# Altium PCB PCB2.PcbDoc
Units mm, origin at the board's own origin, x right, y up, seen from the top; angles counter-clockwise.
Board outline 103 x 103 mm, 4 copper layers (Top Layer, Internal Plane 1, Internal Plane 2, Bottom Layer); 6 components, 18 nets, 81 pads, 0 vias.
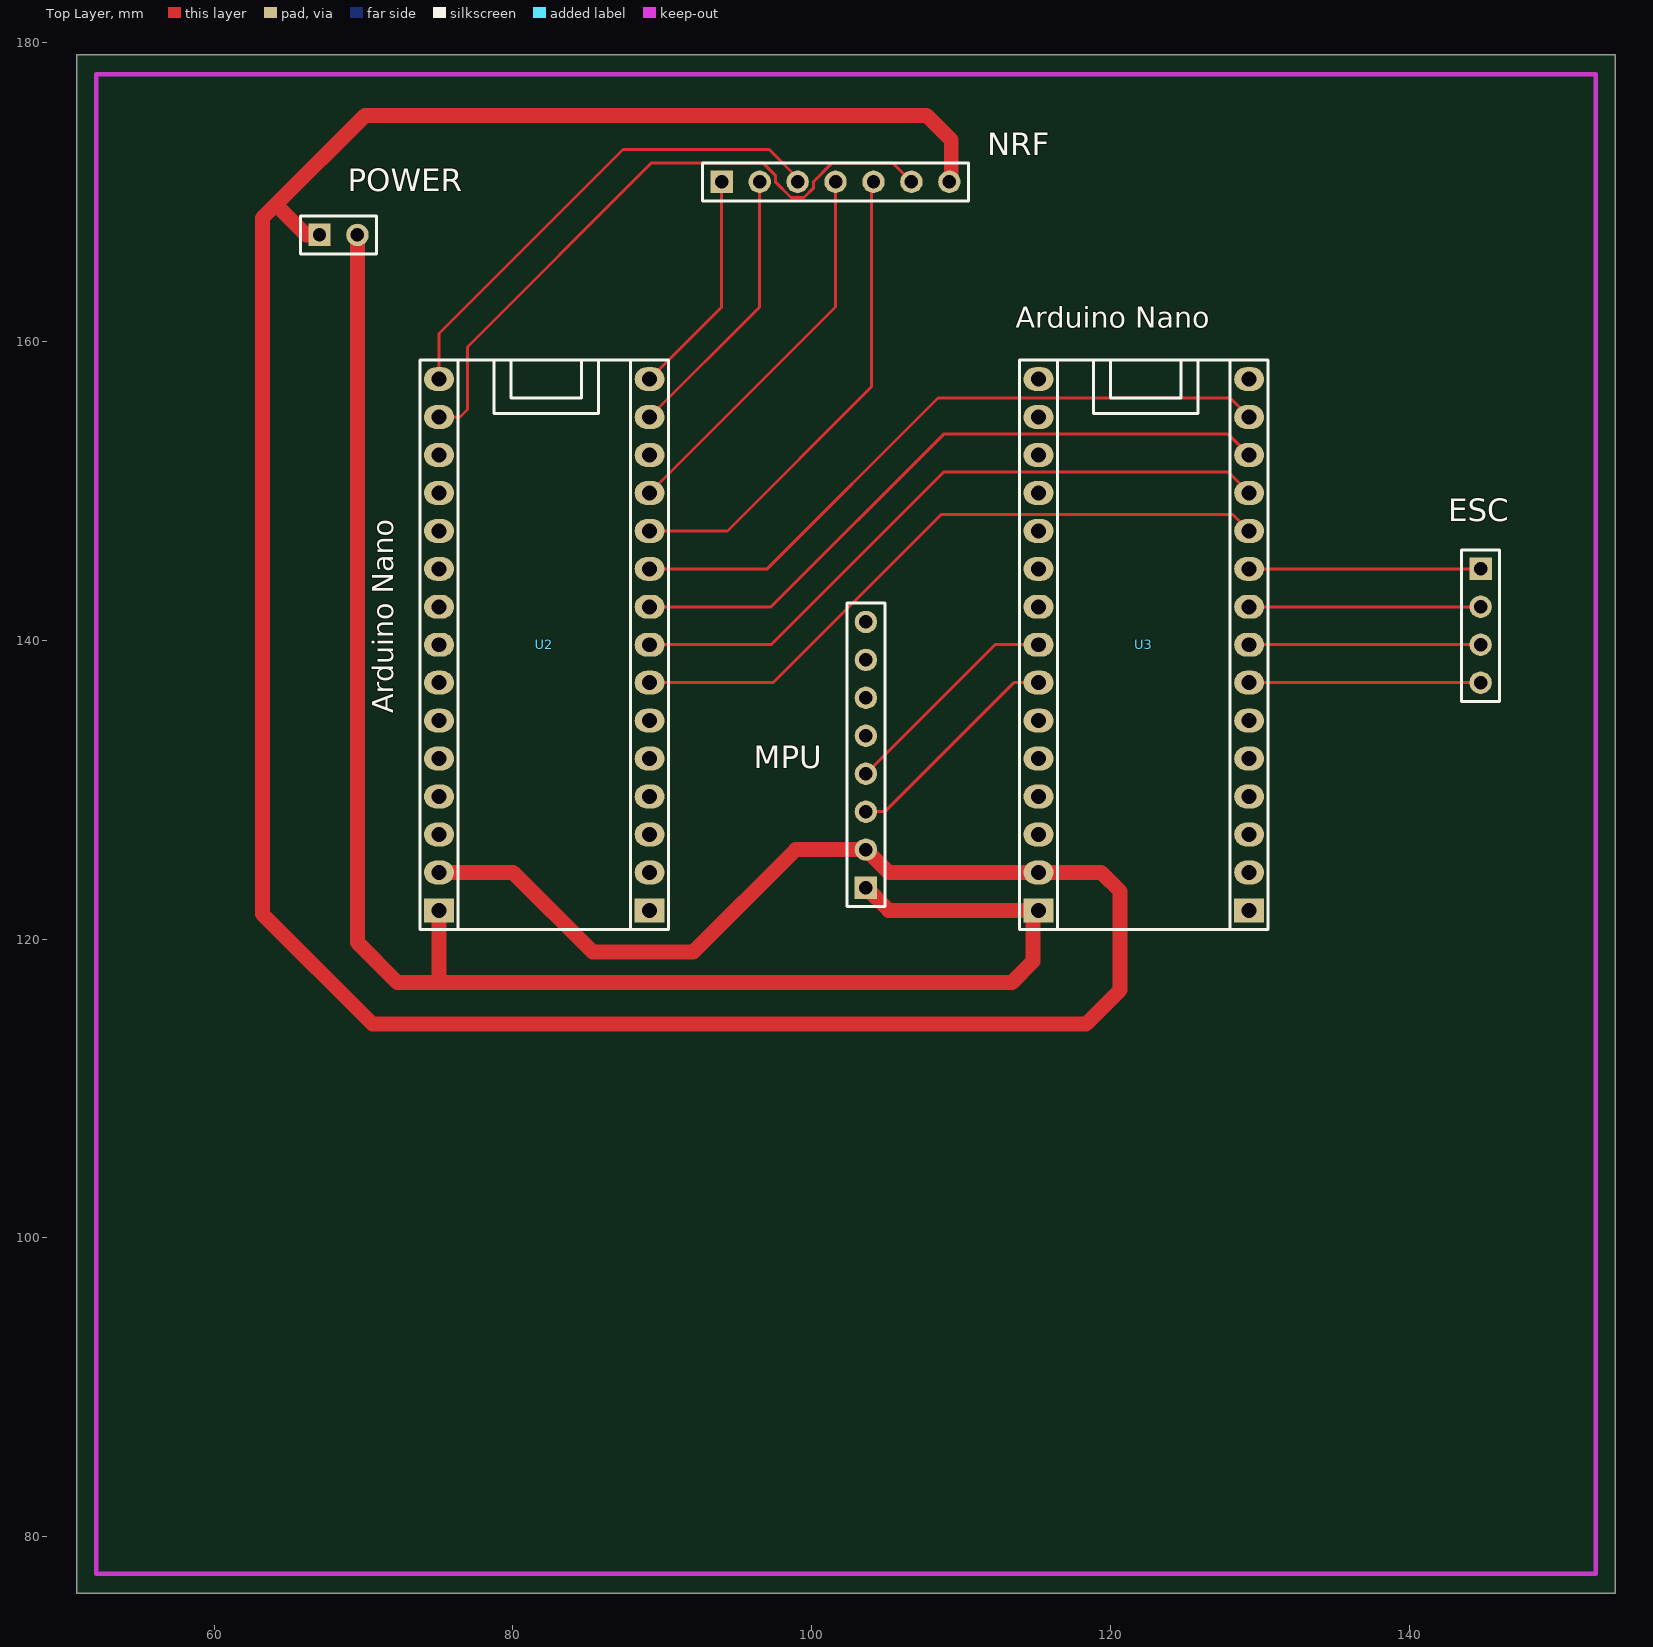
[diagram p0: Top Layer view]
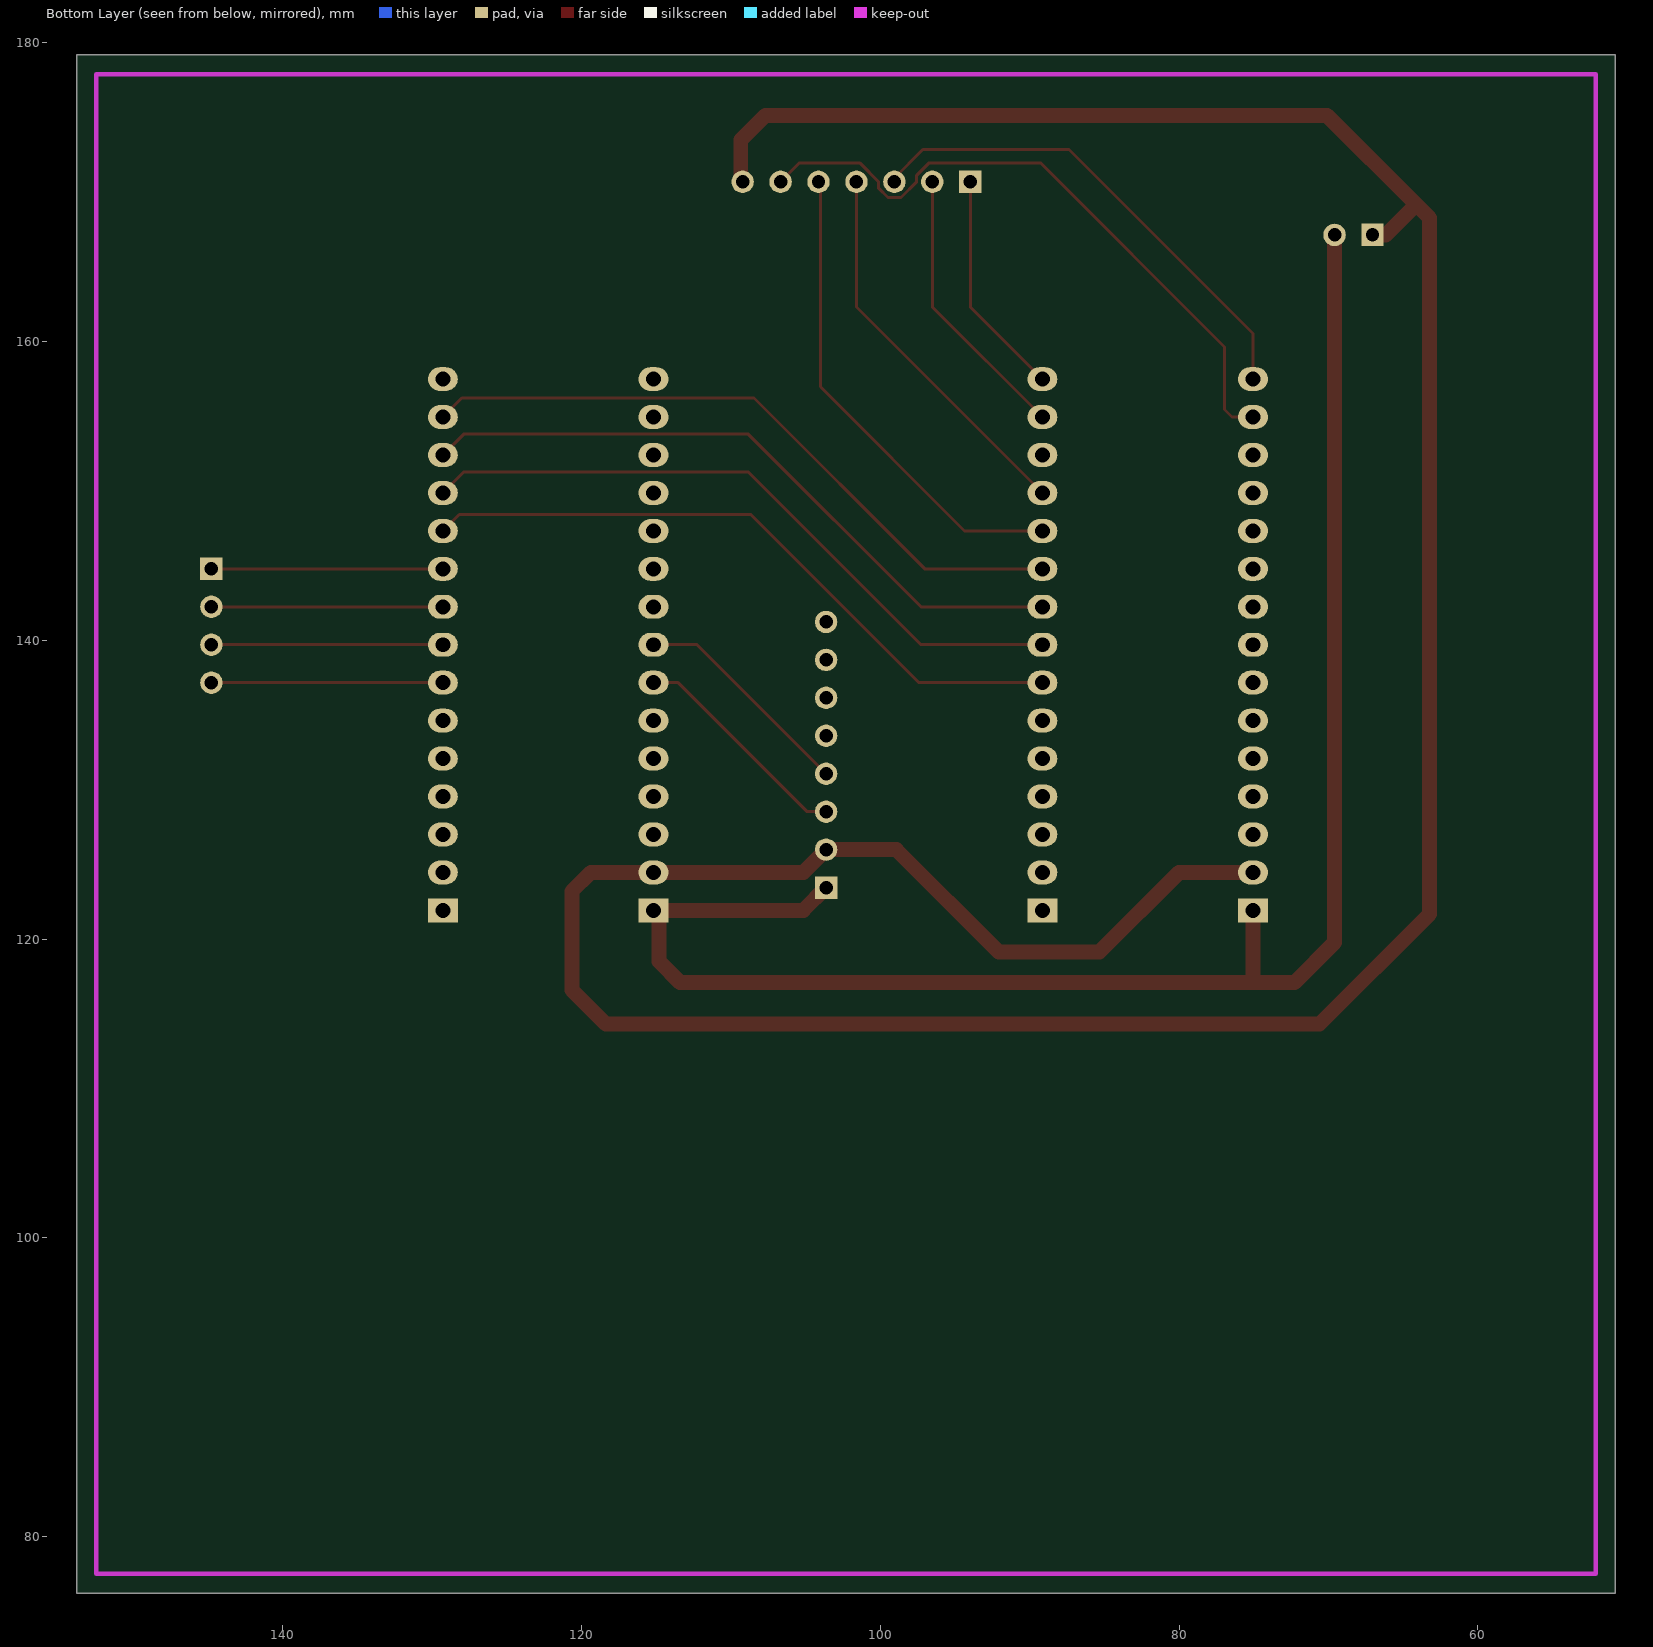
[diagram p1: Bottom Layer view, seen from below]
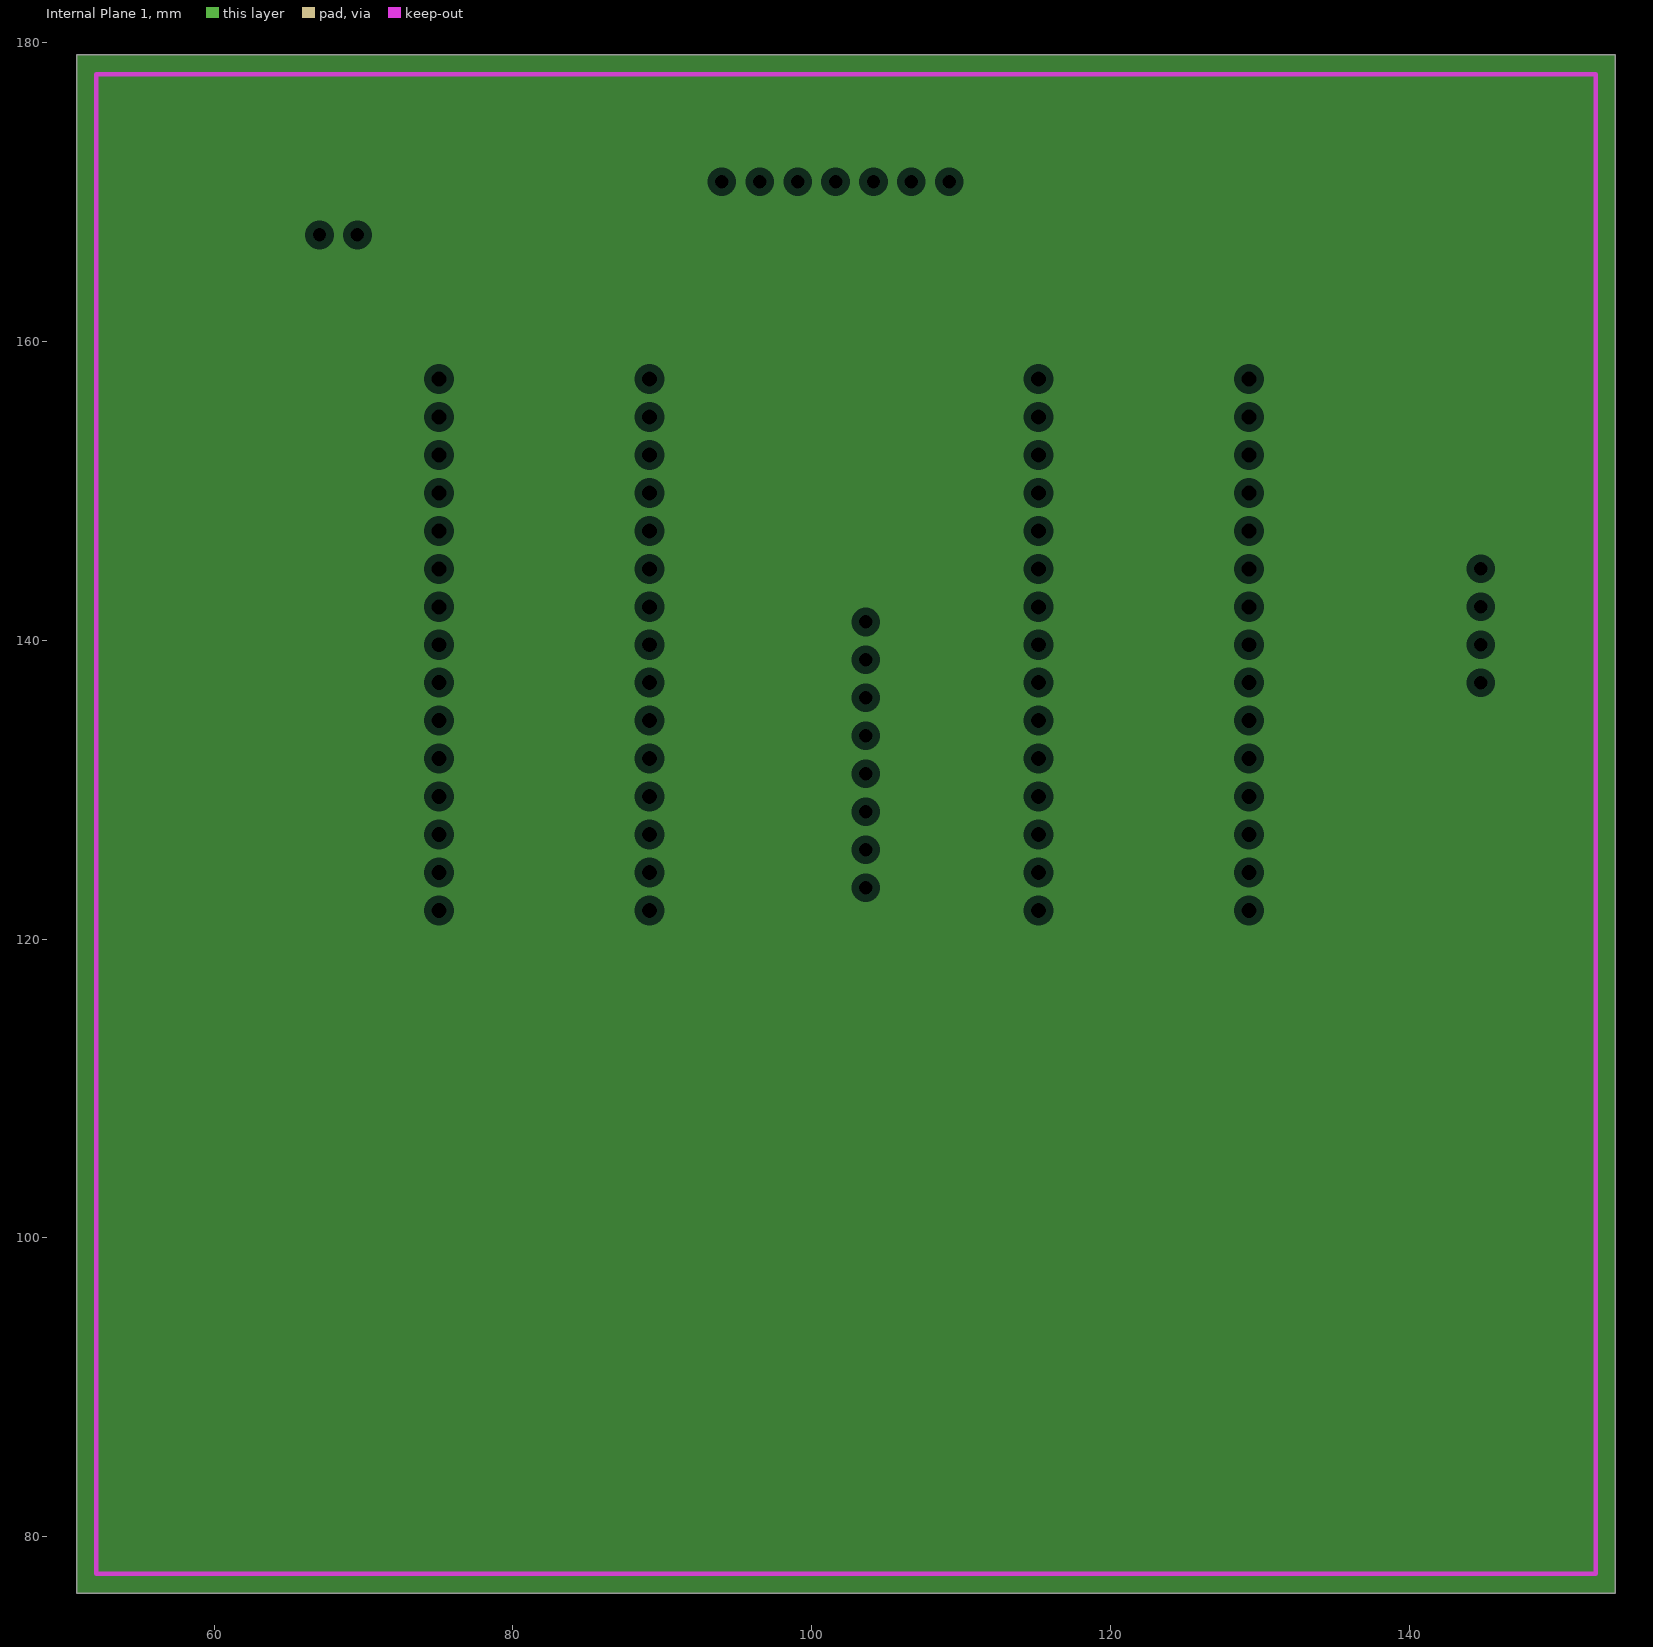
[diagram p2: Internal Plane 1, clearances drawn from the general rule]
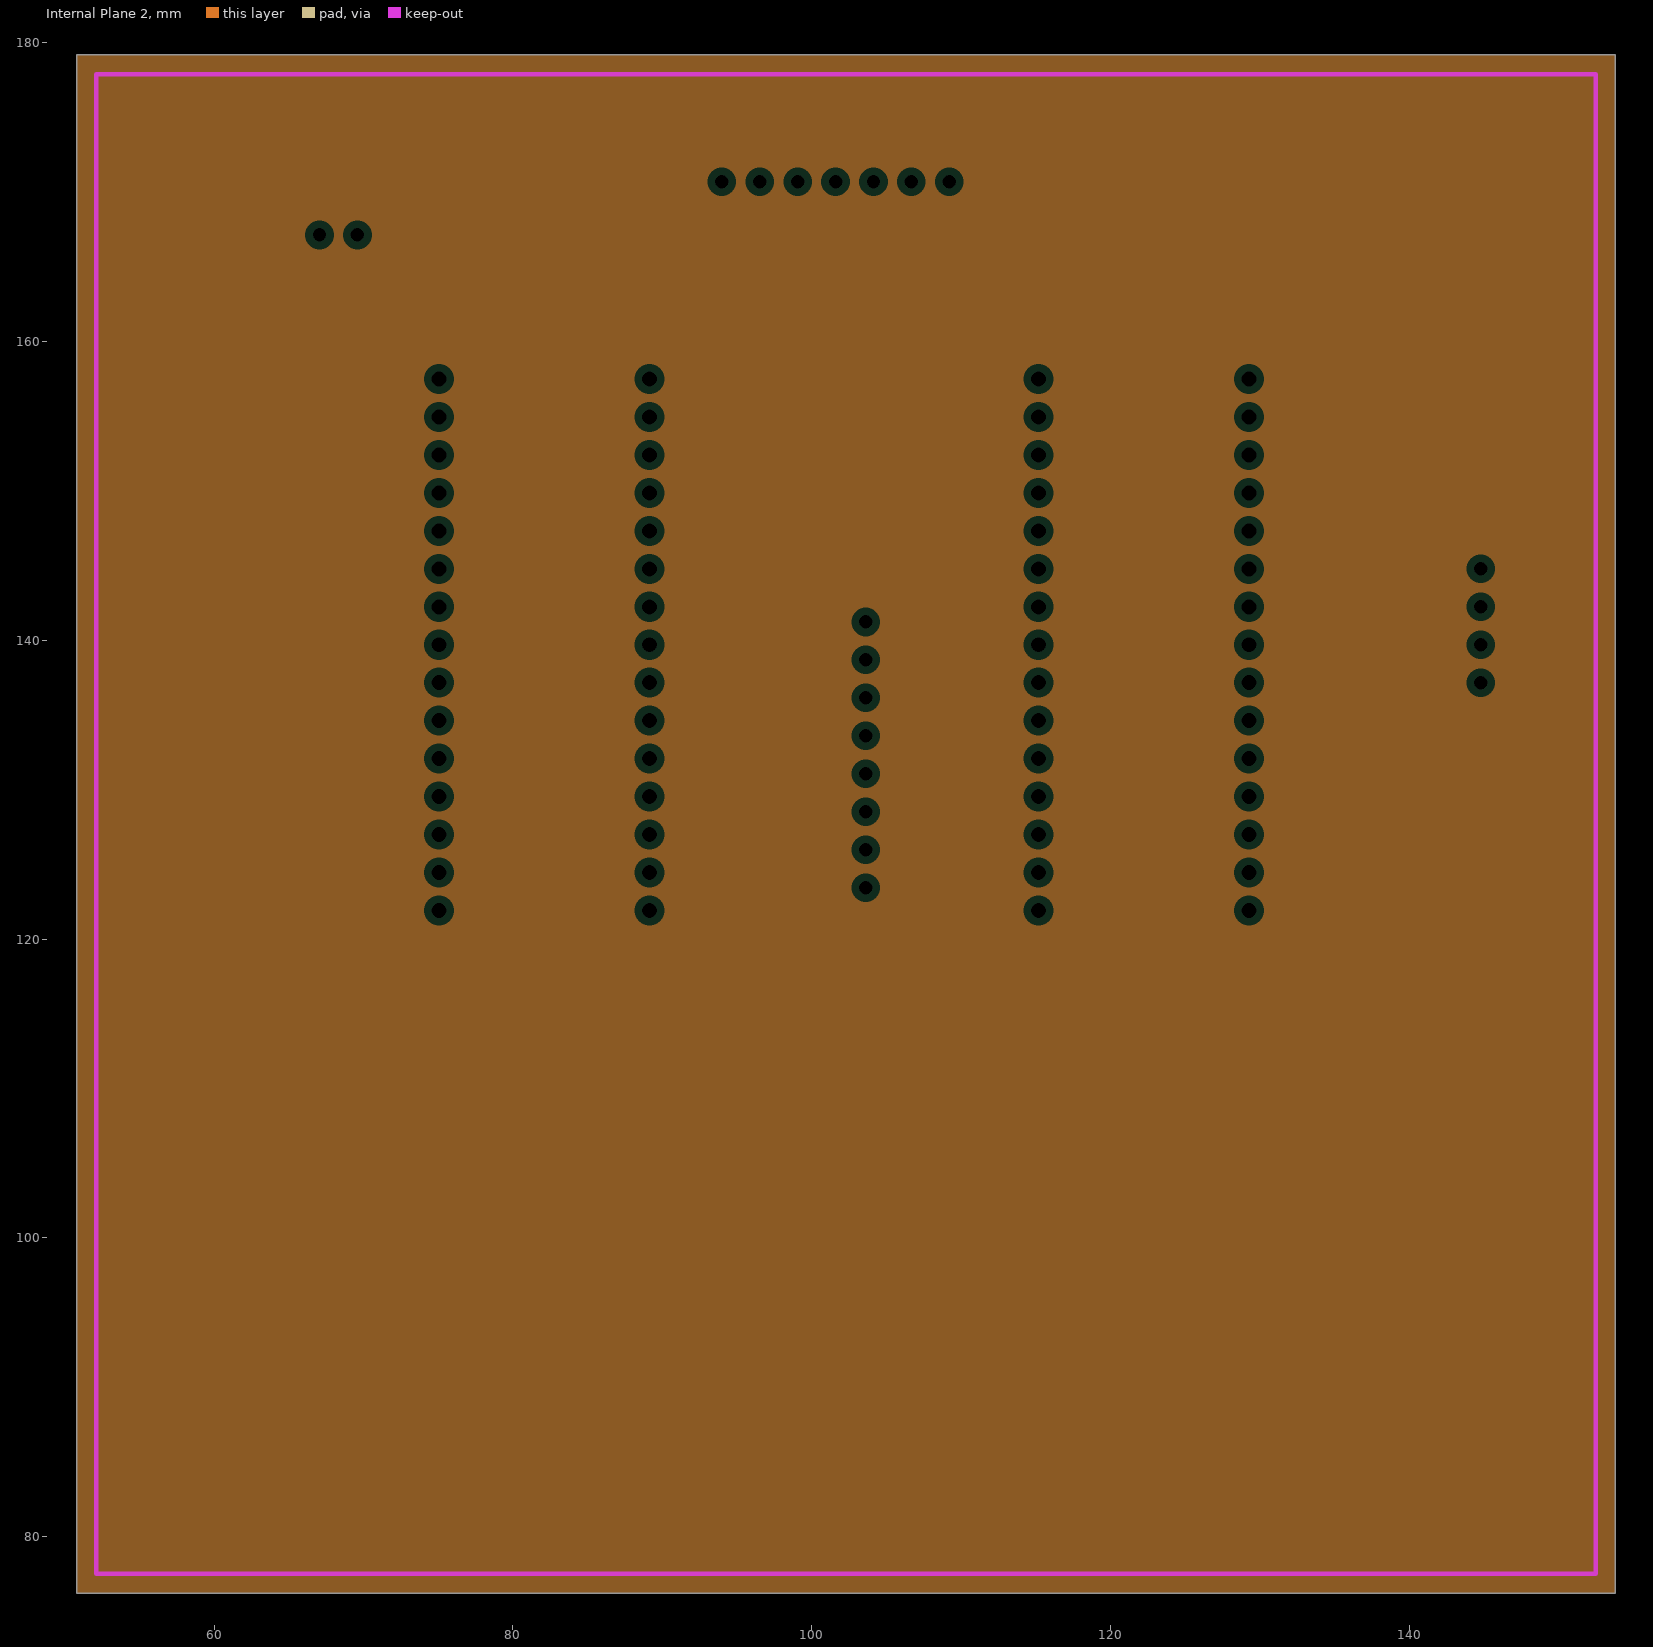
[diagram p3: Internal Plane 2, clearances drawn from the general rule]

## Layer stack, top to bottom
Top Layer: signal copper 0.0356
Dielectric: dielectric 0.32, FR-4, Dk 4.8
Internal Plane 1: plane copper 0.0356
Dielectric: dielectric 0.32, FR-4, Dk 4.8
Internal Plane 2: plane copper 0.0356
Dielectric: dielectric 0.32, FR-4, Dk 4.8
Bottom Layer: signal copper 0.0356

## Board outline
50.8,76.2 153.8,76.2 153.8,179.2 50.8,179.2

## Design rules (kind name [scope] priority, off if disabled: settings)
Clearance [All] p1: gap=0.2
PlaneClearance [All] p1: clearance=0.508
PlaneConnect [All] p1: planeconnectstyle=Relief reliefexpansion=0.508 reliefentries=4 reliefconductorwidth=0.254 reliefairgap=0.254
PolygonConnect [All] p1: connectstyle=Relief reliefconductorwidth=0.254 reliefentries=4 polygonreliefangle="90 Angle"
RoomDefinition Sheet2 [InComponentClass('Sheet2')] p1: confinementstyle=ConfineIn formatcopy=TRUE lockcomponents=FALSE outline 154.94,117.094 207.645,117.094 207.645,160.274 154.94,160.274
RoutingVias [All] p1: holewidth=0.6 width=1 viastyle="Through Hole" minholewidth=0.711 minwidth=1.27 maxholewidth=0.711 maxwidth=1.27
SilkscreenOverComponentPads [All] p1: minsilkscreentomaskgap=0.254
SolderMaskExpansion [All] p1: expansion=0.102
Width GND [InNet('GND')] p1: maxlimit=1 minlimit=1 preferedwidth=1
Width VCC [InNet('+5')] p2: maxlimit=1 minlimit=1 preferedwidth=1
Width [All] p3: maxlimit=0.2 minlimit=0.2 preferedwidth=0.2
25 further rules are at their usual default settings.

## Components (designator, comment, footprint, x,y, rotation, side; value= is the part's Value field where it differs from the comment)
ESC "ESC*4" HDR1X4 144.78,144.78 r270 top (schematic designator P5)
MPU "MPU6050" HDR1X8 103.632,123.444 r90 top (schematic designator P7)
NRF "NRF24" HDR1X7 93.98,170.688 r0 top (schematic designator P8)
POWER "Power" HDR1X2 67.056,167.132 r0 top (schematic designator P6)
U2 "Arduino Nano" PCBComponent_1 82.296,140.716 r270 top
U3 "Arduino Nano" PCBComponent_1 122.428,140.716 r270 top

## Footprints (in the part's own frame and the unit in brackets; to place one, negate y for a bottom-side part, rotate by r counter-clockwise, add the part's x,y. Pads: shape width x height; smd on the part's side, far side on the other; paste and mask are expansions set on the pad)
HDR1X2 [mm] "Connector; Header; 2 Position"
  rect 1.5x1.5 hole 0.9: 1(0,0)
  round 1.5 hole 0.9: 2(2.54,0)
  silkscreen extent -1.27,-1.27 3.81,1.27
HDR1X4 [mm] "Connector; Header; 4 Position"
  rect 1.5x1.5 hole 0.9: 1(0,0)
  round 1.5 hole 0.9: 2(2.54,0) 3(5.08,0) 4(7.62,0)
  silkscreen extent -1.27,-1.27 8.89,1.27
HDR1X7 [mm] "Connector; Header; 7 Position"
  rect 1.5x1.5 hole 0.9: 1(0,0)
  round 1.5 hole 0.9: 2(2.54,0) 3(5.08,0) 4(7.62,0) 5(10.16,0) 6(12.7,0) 7(15.24,0)
  silkscreen extent -1.27,-1.27 16.51,1.27
HDR1X8 [mm] "Connector; Header; 8 Position"
  rect 1.5x1.5 hole 0.9: 1(0,0)
  round 1.5 hole 0.9: 2(2.54,0) 3(5.08,0) 4(7.62,0) 5(10.16,0) 6(12.7,0) 7(15.24,0) 8(17.78,0)
  silkscreen extent -1.27,-1.27 19.05,1.27
PCBComponent_1 [mm]
  rect 1.6x2 hole 1: 1(18.796,6.858) 30(18.796,-7.239)
  oval 1.6x2 hole 1: 2(16.256,6.858) 3(13.716,6.858) 4(11.176,6.858) 5(8.636,6.858) 6(6.096,6.858) 7(3.556,6.858) 8(1.016,6.858) 9(-1.524,6.858) 10(-4.064,6.858) 11(-6.604,6.858) 12(-9.144,6.858) 13(-11.684,6.858) 14(-14.224,6.858) 15(-16.764,6.858) 16(-16.764,-7.239) 17(-14.224,-7.239) 18(-11.684,-7.239) 19(-9.144,-7.239) 20(-6.604,-7.239) 21(-4.064,-7.239) 22(-1.524,-7.239) 23(1.016,-7.239) 24(3.556,-7.239) 25(6.096,-7.239) 26(8.636,-7.239) 27(11.176,-7.239) 28(13.716,-7.239) 29(16.256,-7.239)
  silkscreen extent -18.03,-8.51 20.07,8.13

## Part data
ESC: library part "Header 4", "Header, 4-Pin"
MPU: library part "Header 8", "Header, 8-Pin"
NRF: library part "Header 7", "Header, 7-Pin"
POWER: library part "Header 2", "Header, 2-Pin"
U2 U3: library part Component_1

## Nets (pads, with @x,y where several pads share a name; then routed paths per layer and width w, separated by ;. In a path a pad name is that pad's centre, name@x,y a point inside that pad or via, vN(x,y) a via of type N, cw(c..) or ccw(c..) an arc to the next point about the centre after c; other vN are vias at no path point)
3.3V: NRF.6 U2.17 | length 44.1
  Top Layer w0.2: U2.17 76.454,154.94 76.962,155.448 76.962,159.639 89.281,171.958 96.735,171.958 97.57,171.123 97.57,170.693 98.625,169.638 99.495,169.638 100.11,170.253 100.11,170.683 101.385,171.958 105.41,171.958 NRF.6
+5: MPU.1 POWER.2 U2.30 U3.30 | length 115.2
  Top Layer w1: POWER.2 69.596,119.761 72.263,117.094 75.057,117.094 ; U2.30@74.803,121.666 U2.30 75.057,117.094 ; MPU.1 105.156,121.92 U3.30 114.808,121.539 114.808,118.491 113.411,117.094 75.057,117.094
CE: NRF.5 U2.11 | length 32.6
  Top Layer w0.2: U2.11 94.361,147.32 104.013,156.972 104.013,170.561 NRF.5
CSN: NRF.4 U2.12 | length 26
  Top Layer w0.2: U2.12 101.6,162.306 NRF.4
GND: MPU.2 NRF.7 POWER.1 U2.29 U3.29 | length 222.7
  Top Layer w1: POWER.1 66.167,167.132 64.135,169.164 ; U2.29 80.01,124.46 85.344,119.126 92.075,119.126 98.933,125.984 MPU.2 105.156,124.46 U3.29 119.38,124.46 120.65,123.19 120.65,116.586 118.364,114.3 70.612,114.3 63.246,121.666 63.246,168.275 64.135,169.164 ; NRF.7 109.347,170.815 109.347,173.482 107.696,175.133 70.104,175.133 64.135,169.164
MISO: NRF.1 U2.15 | length 15.2
  Top Layer w0.2: U2.15 93.98,162.306 NRF.1
MOSI: NRF.2 U2.14 | length 18.8
  Top Layer w0.2: U2.14 96.52,162.306 NRF.2
NetP5_1: ESC.1 U3.10 | length 15.5
  Top Layer w0.2: U3.10 ESC.1
NetP5_2: ESC.2 U3.9 | length 15.5
  Top Layer w0.2: U3.9 ESC.2
NetP5_3: ESC.3 U3.8 | length 15.5
  Top Layer w0.2: U3.8 ESC.3
NetP5_4: ESC.4 U3.7 | length 15.5
  Top Layer w0.2: U3.7 ESC.4
NetU2_7: U2.7 U3.11 | length 45.3
  Top Layer w0.2: U2.7 97.409,137.16 108.669,148.42 128.186,148.42 U3.11
NetU2_8: U2.8 U3.12 | length 45.5
  Top Layer w0.2: U2.8 97.282,139.7 108.839,151.257 127.889,151.257 U3.12
NetU2_9: U2.9 U3.13 | length 45.5
  Top Layer w0.2: U2.9 97.282,142.24 108.839,153.797 127.889,153.797 U3.13
NetU2_10: U2.10 U3.14 | length 45.4
  Top Layer w0.2: U2.10 97.028,144.78 108.458,156.21 128.016,156.21 U3.14
SCK: NRF.3 U2.16 | length 33.2
  Top Layer w0.2: U2.16 75.057,160.528 87.376,172.847 97.155,172.847 99.06,170.942 NRF.3
SCL: MPU.3 U3.24 | length 15.1
  Top Layer w0.2: MPU.3 104.902,128.524 113.538,137.16 U3.24
SDA: MPU.4 U3.23 | length 15.1
  Top Layer w0.2: MPU.4 112.268,139.7 U3.23
pads on no net: MPU.5 MPU.6 MPU.7 MPU.8 U2.1 U2.2 U2.3 U2.4 U2.5 U2.6 U2.13 U2.18 U2.19 U2.20 U2.21 U2.22 U2.23 U2.24 U2.25 U2.26 U2.27 U2.28 U3.1 U3.2 U3.3 U3.4 U3.5 U3.6 U3.15 U3.16 U3.17 U3.18 U3.19 U3.20 U3.21 U3.22 U3.25 U3.26 U3.27 U3.28

## Polygon pours and split planes (outlines as drawn)
no net on Internal Plane 1 (split plane): 153.8,76.2 50.8,76.2 50.8,179.2 153.8,179.2
no net on Internal Plane 2 (split plane): 153.8,76.2 50.8,76.2 50.8,179.2 153.8,179.2

## Keep-outs
Keep-Out Layer:
  lines w0.3: 52.1,77.5 52.1,177.9 152.5,177.9 152.5,77.5 52.1,77.5

## Silkscreen, mask and mechanical layers (free items; w line width, h text height)
Drill Drawing:
  text ".LEGEND" at 158.88,81.28 h1.52
  text "Drill Drawing." at 158.88,78.74 h1.52

## Dimensions
52.1,77.5 to 52.1,177.9 on Mechanical 1
52.1,77.5 to 152.5,77.5 on Mechanical 1